# EAGLE board 12VAttinyDischargeChecker-B3 (EAGLE 8.5.2)

Size 100.33 x 70 mm. Coordinates in mm from the lower left corner, seen from the top.
Outline: 0,69.85 0,0 100.33,0 100.33,69.85
Outline: 0,69.85 0,70
Outline: 0,69.85 100,69.85
Copper layers (1*16): Top 0.035mm / dielectric 1.5mm / Bottom 0.035mm
Design rules "default": minimum track width 10mil, minimum drill 24mil, track to track 8mil, track to pad 8mil, pad to pad 8mil, via to via 8mil, smd to smd 8mil, copper to edge 40mil, drill to drill 8mil, minimum pad ring 10mil, minimum via ring 8mil, stop-mask expansion 4mil, vias tented up to drill 0mil, thermal gap 10mil

## Footprints (pad centres in the part's own frame; a part is rotated, then mirrored left to right if it is on the bottom)
WIRELESS-RX-FLAT = drill 0.8 long: P$1 3.81,-6.985; P$2 6.35,-6.985; P$3 8.89,-6.985; P$4 11.43,-6.985
WIRELESS-TX-FLAT = drill 0.8 long: P$1 0.635,-6.35; P$2 -1.905,-6.35; P$3 3.175,-6.35
MA04-1 = drill 1.016 long: 1 -3.81,0; 2 -1.27,0; 3 1.27,0; 4 3.81,0

## Placement (x,y rotation side)
E$1  [WIRELESS-RX-FLAT]  12.06,54.61 90 top
E$2  [WIRELESS-RX-FLAT]  16.51,24.13 270 top
E$3  [WIRELESS-TX-FLAT]  29.21,22.23 270 top
E$4  [WIRELESS-TX-FLAT]  29.84,59.05 0 top
E$5  [WIRELESS-RX-FLAT]  48.9,54.61 270 top
E$6  [WIRELESS-TX-FLAT]  31.11,41.91 180 top
E$7  [WIRELESS-RX-FLAT]  85.72,20.32 270 top
E$8  [WIRELESS-TX-FLAT]  67.94,15.88 180 top
E$9  [WIRELESS-RX-FLAT]  81.28,50.8 90 top
E$10  [WIRELESS-TX-FLAT]  68.58,52.7 90 top
E$11  [WIRELESS-RX-FLAT]  48.9,20.32 90 top
E$12  [WIRELESS-TX-FLAT]  66.67,33.02 0 top
E$13  [MA04-1]  96.52,49.53 90 top
E$14  [MA04-1]  96.52,36.83 90 top
E$16  [MA04-1]  3.81,58.42 90 top
E$19  [MA04-1]  3.81,16.51 90 top
E$20  [MA04-1]  3.81,39.37 90 top
E$26  [MA04-1]  96.52,62.23 90 top

## Library data of the parts
E$1-E$12 = LSGPackages
E$13 E$14 E$16 E$19 E$20 E$26 = con-lstb

## Nets
S$2: E$1.P$4 E$4.P$3 E$16.4
S$3: E$5.P$1 E$6.P$1 E$20.3
S$5: E$7.P$4 E$8.P$3 E$14.1
S$7: E$1.P$1 E$4.P$1 E$16.2
S$8: E$5.P$4 E$6.P$3 E$20.4
S$9: E$2.P$4 E$3.P$3 E$19.1
S$10: E$2.P$1 E$3.P$1 E$19.3
S$11: E$2.P$3 E$19.2
S$12: E$1.P$3 E$16.3
S$13: E$7.P$1 E$8.P$1 E$14.3
S$14: E$3.P$2 E$19.4
S$15: E$4.P$2 E$16.1
S$16: E$6.P$2 E$20.2
S$17: E$9.P$3 E$26.3
S$18: E$11.P$1 E$12.P$1 E$13.2
S$19: E$11.P$4 E$12.P$3 E$13.1
S$20: E$9.P$4 E$10.P$3 E$26.4
S$21: E$9.P$1 E$10.P$1 E$26.2
S$22: E$10.P$2 E$26.1
S$23: E$12.P$2 E$13.3
S$24: E$8.P$2 E$14.4
S$25: E$7.P$3 E$14.2
S$26: E$5.P$3 E$20.1
S$27: E$11.P$3 E$13.4

## Tracks (layer width: path | path; a pad name or v marks a point on that pad's centre or on a via)
S$2  (2 unrouted)
S$3  (2 unrouted)
S$5  (2 unrouted)
S$7  (2 unrouted)
S$8  (2 unrouted)
S$9  (2 unrouted)
S$10  (2 unrouted)
S$11  (1 unrouted)
S$12  (1 unrouted)
S$13  (2 unrouted)
S$14  (1 unrouted)
S$15  (1 unrouted)
S$16  (1 unrouted)
S$17  (1 unrouted)
S$18  (2 unrouted)
S$19  (2 unrouted)
S$20  (2 unrouted)
S$21  (2 unrouted)
S$22  (1 unrouted)
S$23  (1 unrouted)
S$24  (1 unrouted)
S$25  (1 unrouted)
S$26  (1 unrouted)
S$27  (1 unrouted)

## Text on the board
bTest: B0 | B0 | B1 | B5 | B5 | B5 | B0 | B3 | B1 | B3 | B4 | B2 | B1 | B3 | B4 | B2 | B2 | B4